# Altium PCB INC-POGOPIN002_435.PcbDoc
Units mil, origin at the board's own origin, x right, y up, seen from the top; angles counter-clockwise.
Board outline 590.55 x 635.48 mil, 2 copper layers (Top Layer, Bottom Layer); 1 components, 6 nets, 14 pads, 2 vias.
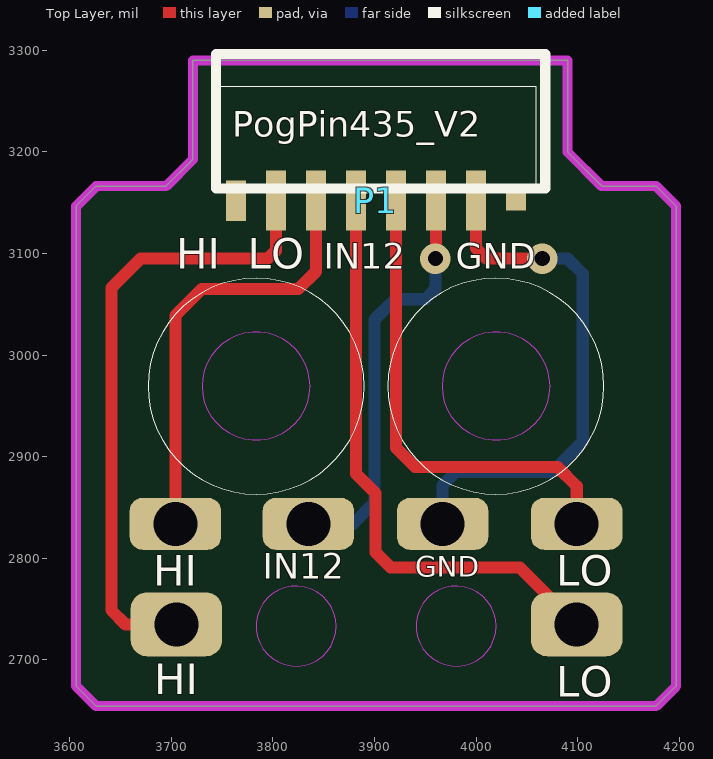
[diagram p0: Top Layer view]
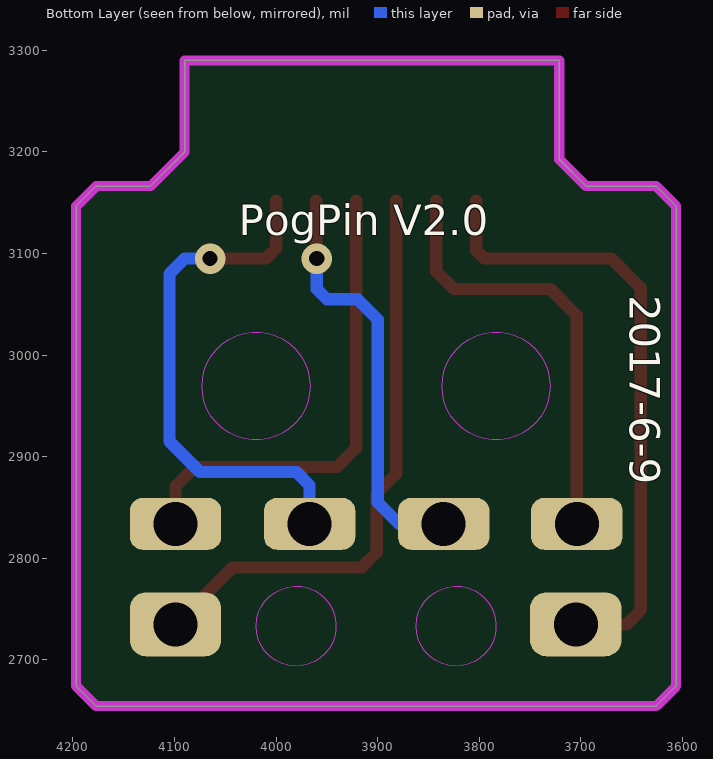
[diagram p1: Bottom Layer view, seen from below]

## Layer stack, top to bottom
Top Solder: solder mask 0.4, Solder Resist, Dk 3.5
Top Layer: signal copper 1.4
Dielectric 1: dielectric 12.6, FR-4, Dk 4.8
Bottom Layer: signal copper 1.4
Bottom Solder: solder mask 0.4, Solder Resist, Dk 3.5

## Board outline
3606.3,2674.2 3606.3,3146.64 3625.98,3166.33 3694.88,3166.33 3721.33,3192.78 3721.33,3290 4090,3290 4090,3200 4123.67,3166.33 4177.16,3166.33 4196.85,3146.64 4196.85,2674.2 4177.16,2654.52 3625.98,2654.52

## Design rules (kind name [scope] priority, off if disabled: settings)
Clearance [All] p1: gap=10 ignorepadtopadclearanceinfootprint=FALSE except(0: Arc-Hole Track-Hole SMDPad-Hole THPad-Hole Via-Hole Fill-Hole Poly-Hole Region-Hole Text-Hole)
PolygonConnect [All] p1: connectstyle=Relief reliefconductorwidth=10 reliefentries=4 polygonreliefangle="90 Angle" airgapwidth=10
RoutingVias [All] p1: holewidth=28 width=50 viastyle="Through Hole" minholewidth=28 minwidth=50 maxholewidth=28 maxwidth=50
SolderMaskExpansion [All] p1: expansion=4
Width [All] p1: maxlimit=50 minlimit=10 preferedwidth=12 minimp=50.000000 maximp=50.000000 favimp=50.000000
30 further rules are at their usual default settings.

## Components (designator, comment, footprint, x,y, rotation, side; value= is the part's Value field where it differs from the comment)
P1 "Comment" SH1.0 3803,3152 r0 top

## Footprints (in the part's own frame and the unit in brackets; to place one, negate y for a bottom-side part, rotate by r counter-clockwise, add the part's x,y. Pads: shape width x height; smd on the part's side, far side on the other; paste and mask are expansions set on the pad)
SH1.0 [mm] "6P卧贴插座"
  rect 0.5x1.016 smd: 0(-1,0)
  rect 0.5x0.5 smd: 0(6,0)
  rect 0.5x1.5 smd: 1(0,0) 2(1,0) 3(2,0) 4(3,0) 5(4,0) 6(5,0)
  silkscreen extent -1.5,0.3 6.73,3.66

## Free pads (board coordinates)
  rrect50% 90x51.18 hole 43.31: 1(3704,2834) 3(4099,2834) 5(3835,2834) 6(3967,2834)
  rrect50% 90x62.99 hole 43.31: 2(3705,2735) 4(4099,2735)

## Via types
v1: diameter 30, hole 15, Top Layer to Bottom Layer, 2 vias

## Nets (pads, with @x,y where several pads share a name; then routed paths per layer and width w, separated by ;. In a path a pad name is that pad's centre, name@x,y a point inside that pad or via, vN(x,y) a via of type N, cw(c..) or ccw(c..) an arc to the next point about the centre after c; other vN are vias at no path point)
GND: P1.6 pad.6 | length 521.2
  Top Layer w12: P1.6 3999.85,3105.15 4010,3095 v1(4065,3095)
  Bottom Layer w12: pad.6 3967,2872 3980,2885 4075,2885 4105,2915 4105,3080 4090,3095 v1(4065,3095)
HI1: P1.1 pad.2 | length 613.1
  Top Layer w12: pad.2 3655,2735 3641,2749 3641,3066 3670,3095 3795,3095 3803,3103 P1.1
HI2: P1.2 pad.1 | length 431
  Top Layer w12: pad.1 3704,3039 3730,3065 3825,3065 3842.37,3082.37 P1.2
IN12: P1.5 pad.5 | length 413.3
  Top Layer w12: v1(3960,3095) 3960.48,3095.48 P1.5
  Bottom Layer w12: pad.5 3879,2834 3900,2855 3900,3035 3920,3055 3950,3055 3960,3065 v1(3960,3095)
LO1: P1.3 pad.4 | length 581.4
  Top Layer w12: P1.3 3881.74,2883.26 3901,2864 3901,2806 3916,2791 4043,2791 pad.4
LO2: P1.4 pad.3 | length 473.7
  Top Layer w12: P1.4 3921.11,2908.89 3940,2890 4080,2890 4099,2871 pad.3
pads on no net: P1.0

## Keep-outs
Keep-Out Layer:
  circle w0.5: c3783.46,2969.48 r53.15
  circle w0.5: c4019.68,2969.48 r53.15
  circle w0.5: c3822.83,2733.26 r39.37
  circle w0.5: c3980.31,2733.26 r39.37
  lines w10: 3606.3,2674.2 3625.98,2654.52 4177.16,2654.52 4196.85,2674.2 4196.85,3146.64 4177.16,3166.33 4123.67,3166.33 4090,3200 4090,3290 3721.33,3290 3721.33,3195 3721.33,3192.78 3694.88,3166.33 3625.98,3166.33 3606.3,3146.64 3606.3,2674.2

## Silkscreen, mask and mechanical layers (free items; w line width, h text height)
Top Overlay:
  circle w0.5: c4019.46,2969.48 r106.3
  circle w0.5: c3783.46,2969.48 r106.3
  lines w0.5: 3744.09,3166.33 3744.09,3264.75 4059.05,3264.75 4059.05,3166.33
  text "PogPin435_V2" at 3760,3215 h25
  text "HI" at 3705,3085 h30
  text "LO" at 3775,3085 h30
  text "IN12" at 3850,3085 h25
  text "GND" at 3980,3085 h25
  text "GND" at 3940,2782 h20
  text "IN12" at 3790,2780 h25
  text "HI" at 3682,2773 h30
  text "LO" at 4079,2773 h30
  text "HI" at 3683,2666 h30
  text "LO" at 4079,2664 h30
Bottom Overlay:
  text "PogPin V2.0" at 4037,3118 h30
  text "2017-6-9" at 3652,3059 h30 r90